# Altium PCB PCB1.PcbDoc
Units mm, origin at the board's own origin, x right, y up, seen from the top; angles counter-clockwise.
Board outline 23.14 x 26.97 mm, 2 copper layers (Top Layer, Bottom Layer); 17 components, 11 nets, 49 pads, 0 vias.
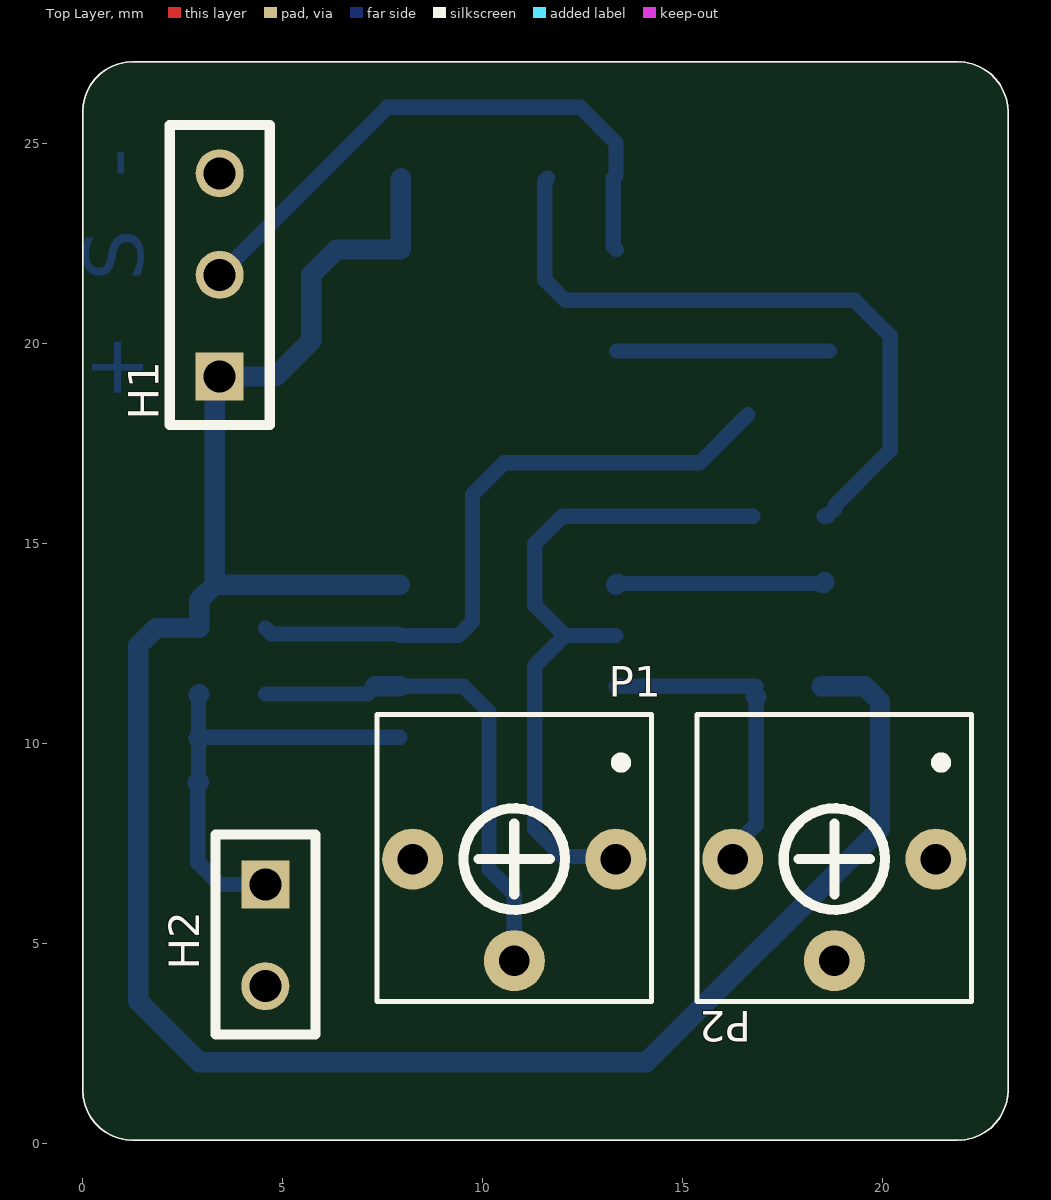
[diagram p0: Top Layer view]
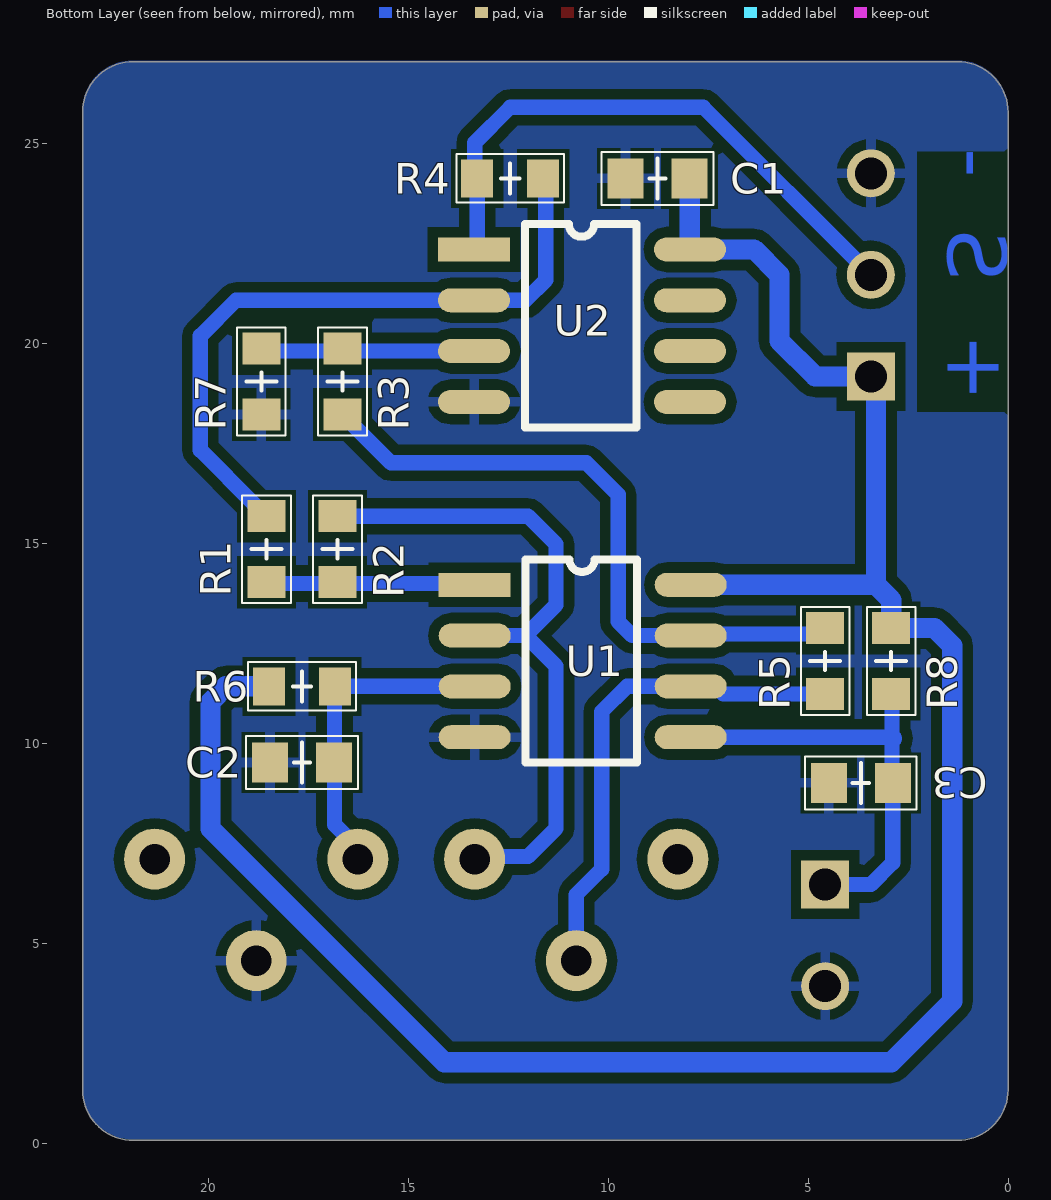
[diagram p1: Bottom Layer view, seen from below]
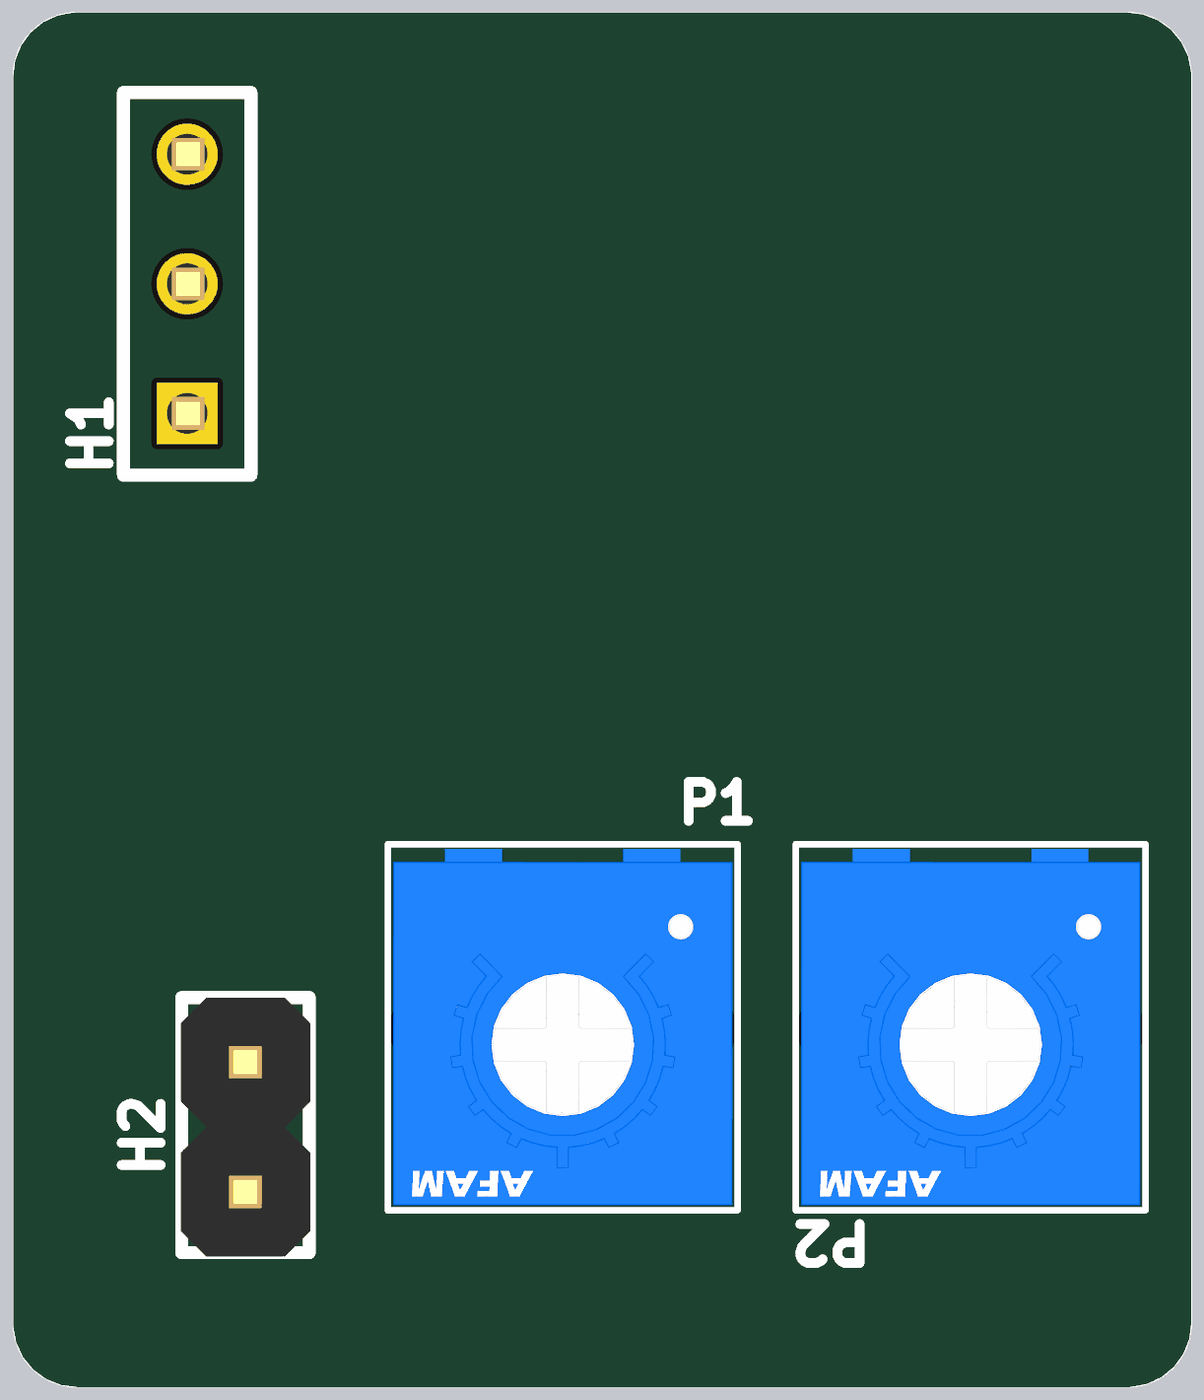
[diagram p2: 3D render of the assembled board from above, using the file's embedded part models]

## Layer stack, top to bottom
Top Solder: solder mask 0.0102, Solder Resist, Dk 3.5
Top Layer: signal copper 0.0356
Dielectric 1: dielectric 0.32, FR-4, Dk 4.8
Bottom Layer: signal copper 0.0356
Bottom Solder: solder mask 0.0102, Solder Resist, Dk 3.5

## Board outline
0,1.347 0,25.781 cw(c1.27,25.781) 1.27,27.051 21.869,27.051 cw(c21.869,25.781) 23.139,25.781 23.139,1.347 cw(c21.869,1.347) 21.869,0.077 1.27,0.077 cw(c1.27,1.347)

## Design rules (kind name [scope] priority, off if disabled: settings)
Clearance [All] p1: gap=0.254 ignorepadtopadclearanceinfootprint=FALSE except(0: Arc-Hole Track-Hole SMDPad-Hole THPad-Hole Via-Hole Fill-Hole Poly-Hole Region-Hole Text-Hole)
PolygonConnect [All] p1: connectstyle=Relief reliefconductorwidth=0.254 reliefentries=4 polygonreliefangle="90 Angle" airgapwidth=0.254
RoomDefinition Sheet-PT-100 [InComponentClass('Sheet-PT-100')] p1: confinementstyle=ConfineIn formatcopy=TRUE lockcomponents=FALSE outline 0,0 23.114,0 23.114,27.051 0,27.051
RoutingVias [All] p1: holewidth=0.711 width=1.27 viastyle="Through Hole" minholewidth=0.711 minwidth=1.27 maxholewidth=0.711 maxwidth=1.27
SolderMaskExpansion [All] p1: expansion=0.102 istentingtop=FALSE
Width [All] p1: maxlimit=0.508 minlimit=0.254 preferedwidth=0.508 toplayer_maxwidth=0.254 toplayer_prefwidth=0.254 minimp=50.000000 maximp=50.000000 favimp=50.000000
30 further rules are at their usual default settings.

## Components (designator, comment, footprint, x,y, rotation, side; value= is the part's Value field where it differs from the comment)
C1 "1uF" C0603 8.763,24.13 r0 bottom
C2 "100nF" C0603 17.653,9.525 r180 bottom
C3 "100nF" C0603 3.683,9.017 r180 bottom
H1 "CONN-3P" HDR-M-2.54-3P 3.429,19.177 r90 top
H2 "CONN-2P" HDR-M-2.54-2P 4.572,6.477 r270 top
P1 "5K" 3362P 10.795,7.112 r180 top
P2 "1K" 3362P 18.796,7.112 r180 top
R1 "8.2K" R0603 18.542,14.859 r90 bottom
R2 "3.9K" R0603 16.764,14.859 r90 bottom
R3 "8.2K" R0603 16.637,19.05 r270 bottom
R4 "47K" R0603 12.446,24.13 r180 bottom
R5 "3.9K" R0603 4.572,12.065 r90 bottom
R6 "220R" R0603 17.653,11.43 r0 bottom
R7 "47K" R0603 18.669,19.05 r270 bottom
R8 "220R" R0603 2.921,12.065 r270 bottom
U1 "LM358" SOIC-8 13.335,13.97 r180 bottom
U2 "LM358" SOIC-8 13.349,22.352 r180 bottom

## Footprints (in the part's own frame and the unit in brackets; to place one, negate y for a bottom-side part, rotate by r counter-clockwise, add the part's x,y. Pads: shape width x height; smd on the part's side, far side on the other; paste and mask are expansions set on the pad)
3362P [mil] "Potentionmeter"
  round 60 hole 30: 1(-100,0) 2(0,100) 3(100,0)
  silkscreen extent -135,-143 135,140, body extent -131,-139 131,136, height 187
C0603 [mm]
  rect 0.9x1 smd: 1(-0.8,0) 2(0.8,0)
  silkscreen extent -1.4,-0.66 1.4,0.66, body extent -0.9,-0.5 0.9,0.5, height 0.8
HDR-M-2.54-2P [mm]
  rect 1.2x1.2 hole 0.8: 1(0,0)
  round 1.2 hole 0.8: 2(2.54,0)
  silkscreen extent -1.25,-1.25 3.75,1.25, body extent -1.25,-1.27 3.83,1.27, height 8.74
HDR-M-2.54-3P [mm]
  rect 1.2x1.2 hole 0.8: 1(0,0)
  round 1.2 hole 0.8: 2(2.54,0) 3(5.08,0)
  silkscreen extent -1.21,-1.25 6.29,1.25, body extent -1.27,-1.29 6.35,1.25, height 8.84
R0603 [mm] "Resistor Surface Mount Device"
  rect 0.8x0.95 smd: 1(-0.825,0) 2(0.825,0)
  silkscreen extent -1.35,-0.61 1.35,0.61, body extent -0.87,-0.48 0.87,0.48, height 0.45
SOIC-8 [mm]
  rect 1.8x0.6 smd: 1(0,0)
  oval 1.8x0.6 smd: 2(0,-1.27) 3(0,-2.54) 4(0,-3.81) 5(5.4,-3.81) 6(5.4,-2.54) 7(5.4,-1.27) 8(5.4,0)
  silkscreen extent 1.27,-4.45 4.06,0.63, body extent -0.25,-4.32 5.65,0.58, height 1.5

## Part data
C1 C2 C3: library part CAP-CER, "Ceramic Capacitor"
H1: "Connector 3 Pole"
H2: "Connector 2 Pole"
P1 P2: library part 3362P, "Potentionmeter", ComponentLink1Description="3362P Potentionmeter Square Trimpot Series", ComponentLink1URL=https://www.bourns.com/docs/Product-Datasheets/3362.pdf
R1 R2 R3 R4 R5 R6 R7 R8: library part Resistor, "Resistor"
U1 U2: "Low-power dual Operational Amplifier", ComponentLink1Description="LM358M Datasheets", ComponentLink1URL=https://www.ti.com/general/docs/suppproductinfo.tsp?distId=10&gotoUrl=https%3A%2F%2Fwww.ti.com%2Flit%2Fgpn%2Flm158-n

## Nets (pads, with @x,y where several pads share a name; then routed paths per layer and width w, separated by ;. In a path a pad name is that pad's centre, name@x,y a point inside that pad or via, vN(x,y) a via of type N, cw(c..) or ccw(c..) an arc to the next point about the centre after c; other vN are vias at no path point)
+5: C1.1 H1.1 R6.2 R8.1 U1.8 U2.8 | length 56.7
  Bottom Layer w0.508: U1.8 3.302,13.97 ; C1.1 7.956,24.123 7.956,22.359 U2.8 6.35,22.352 5.715,21.717 5.715,20.066 4.826,19.177 H1.1 3.302,19.05 3.302,13.97 ; R6.2 19.558,11.43 19.939,11.049 19.939,7.874 14.097,2.032 2.921,2.032 1.397,3.556 1.397,12.446 1.841,12.89 R8.1 2.921,13.589 3.302,13.97
GND: C1.2 C2.1 C3.1 H1.3 H2.2 P2.2 R7.2 U1.4 U2.4
NetC2_2: C2.2 P2.3 R6.1 U1.3 | length 7.8
  Bottom Layer w0.381: U1.3 R6.1 ; P2.3@16.256,7.387 16.84,7.971 R6.1@16.84,11.164
  Bottom Layer w0.508: P2.3 P2.3@16.256,7.387 ; R6.1@16.828,11.176 R6.1@16.84,11.164
NetC3_2: C3.2 H2.1 R8.2 U1.5 | length 11.2
  Bottom Layer w0.381: C3.2 2.883,7.023 3.429,6.477 H2.1 ; C3.2@2.902,9.036 2.902,10.129 R8.2@2.902,11.221 ; 2.933,10.16 U1.5
  Bottom Layer w0.508: C3.2 C3.2@2.902,9.036 ; 2.902,10.129 2.933,10.16 ; R8.2@2.902,11.221 R8.2
NetH1_2: H1.2 R4.1 U2.1 | length 14.7
  Bottom Layer w0.381: H1.2 7.62,25.908 12.446,25.908 13.335,25.019 13.335,24.194 R4.1 13.271,22.43 U2.1
NetP1_1: P1.1 R2.2 U1.2 | length 17.1
  Bottom Layer w0.381: P1.1 13.271,7.175 12.002,7.175 11.303,7.874 11.303,11.938 12.065,12.7 ; U1.2 12.065,12.7 ; R2.2 12.001,15.684 11.303,14.986 11.303,13.462 12.065,12.7
NetP1_2: P1.2 R5.1 U1.6 | length 12.4
  Bottom Layer w0.381: R5.1 7.12,11.24 U1.6@7.31,11.43 ; U1.6 9.525,11.43 10.16,10.795 10.16,6.858 10.795,6.223 P1.2
  Bottom Layer w0.508: U1.6@7.31,11.43 U1.6
NetR1_1: R1.1 R2.1 U1.1 | length 5.2
  Bottom Layer w0.381: U1.1@13.367,14.002 R1.1@18.51,14.002
  Bottom Layer w0.508: U1.1 U1.1@13.367,14.002 ; R1.1@18.51,14.002 R1.1
NetR1_2: R1.2 R4.2 U2.2 | length 17
  Bottom Layer w0.381: R4.2 11.557,24.066 11.557,21.59 12.065,21.082 U2.2 19.304,21.082 20.193,20.193 20.193,17.335 18.827,15.968 18.827,15.894 18.617,15.684 R1.2
NetR3_1: R3.1 R7.1 U2.3 | length 5.3
  Bottom Layer w0.381: U2.3 R7.1@18.669,19.812
NetR3_2: R3.2 R5.2 U1.7 | length 16.3
  Bottom Layer w0.381: R5.2 4.72,12.742 7.893,12.742 U1.7 9.398,12.7 9.748,13.05 9.748,16.225 10.541,17.018 15.43,17.018 R3.2
pads on no net: P1.3 P2.1 U2.5 U2.6 U2.7

## Polygon pours and split planes (outlines as drawn)
GND on Bottom Layer "GND_L02_P000" (solid, pour order 0): 0,1.372 0,25.806 cw(c1.27,25.806) 1.27,27.076 21.869,27.076 cw(c21.869,25.806) 23.139,25.806 23.139,1.372 cw(c21.869,1.372) 21.869,0.102 1.27,0.102 cw(c1.27,1.372)

## Other copper
Bottom Layer:
  text "+  S  -" at 2.001,18.542 h2.54 r90

## Silkscreen, mask and mechanical layers (free items; w line width, h text height)
Top Overlay:
  the board outline again, w0.032